# Altium PCB 24DC-8MWPCB.PcbDoc (part 2 of 2)
Units mm, origin at the board's own origin, x right, y up, seen from the top; angles counter-clockwise.
Board outline 24.64 x 72.65 mm, 2 copper layers (Bottom Layer, Top Layer); 12 components, 34 nets, 50 pads, 4349 vias.
Unrouted connection lines stored in the file: 12.
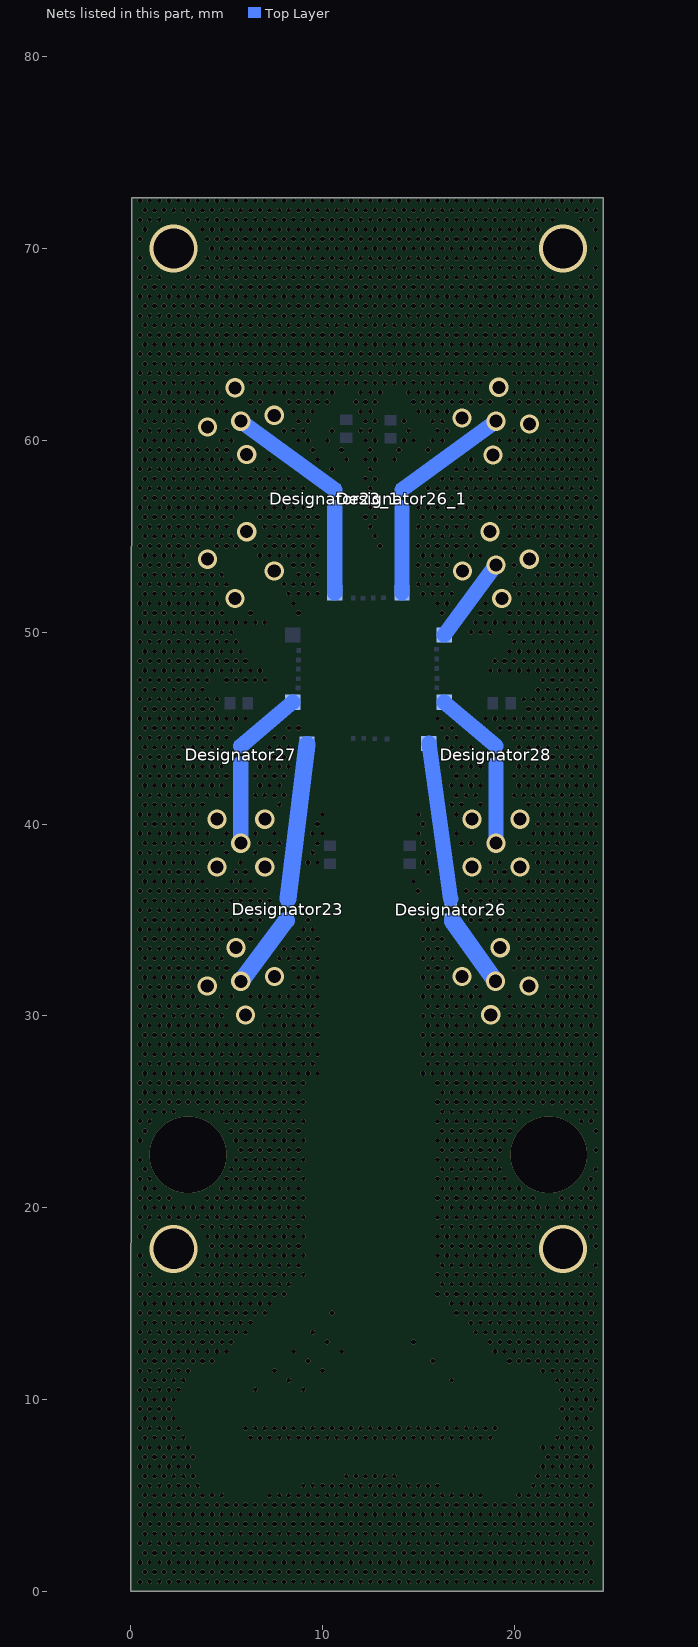
[diagram p2: the nets of this part, all layers, seen from the top]

## Via types
v1: diameter 0.25, hole 0.25, Bottom Layer to Top Layer, 4242 vias
v2: diameter 1, hole 0.68, Bottom Layer to Top Layer, 40 vias
v3: diameter 0.2, hole 0.2, Bottom Layer to Top Layer, 36 vias
v4: diameter 1, hole 0.7, Bottom Layer to Top Layer, 25 vias
v5: diameter 2.5, hole 2.1, Bottom Layer to Top Layer, 3 vias
v6: diameter 4, hole 4, Bottom Layer to Top Layer, 2 vias
v7: diameter 2.5/2.5 (per signal layer), hole 2.1, Bottom Layer to Top Layer, 1 vias

## Nets (pads, with @x,y where several pads share a name; then routed paths per layer and width w, separated by ;. In a path a pad name is that pad's centre, name@x,y a point inside that pad or via, vN(x,y) a via of type N, cw(c..) or ccw(c..) an arc to the next point about the centre after c; other vN are vias at no path point) (continued)
GND: 
  other v1: 0.5,0.5 1,0.5 1.5,0.5 2,0.5 2.5,0.5 3,0.5 3.5,0.5 4,0.5 4.5,0.5 5,0.5 5.5,0.5 6,0.5 6.5,0.5 7,0.5 7.5,0.5 8,0.5 8.5,0.5 9,0.5 9.5,0.5 10,0.5 10.5,0.5 11,0.5 11.5,0.5 12,0.5 12.5,0.5 13,0.5 13.5,0.5 14,0.5 14.5,0.5 15,0.5 15.5,0.5 16,0.5 16.5,0.5 17,0.5 17.5,0.5 18,0.5 18.5,0.5 19,0.5 19.5,0.5 20,0.5 20.5,0.5 21,0.5 21.5,0.5 22,0.5 22.5,0.5 23,0.5 23.5,0.5 24,0.5 0.75,1 1.25,1 1.75,1 2.25,1 2.75,1 3.25,1 3.75,1 4.25,1 4.75,1 5.25,1 5.75,1 6.25,1 6.75,1 7.25,1 7.75,1 8.25,1 8.75,1 9.25,1 9.75,1 10.25,1 10.75,1 11.25,1 11.75,1 12.25,1 12.75,1 13.25,1 13.75,1 14.25,1 14.75,1 15.25,1 15.75,1 16.25,1 16.75,1 17.25,1 17.75,1 18.25,1 18.75,1 19.25,1 19.75,1 20.25,1 20.75,1 21.25,1 21.75,1 22.25,1 22.75,1 23.25,1 23.75,1 0.5,1.5 1,1.5 1.5,1.5 2,1.5 2.5,1.5 3,1.5 3.5,1.5 4,1.5 4.5,1.5 5,1.5 5.5,1.5 6,1.5 6.5,1.5 7,1.5 7.5,1.5 8,1.5 8.5,1.5 9,1.5 9.5,1.5 10,1.5 10.5,1.5 11,1.5 11.5,1.5 12,1.5 12.5,1.5 13,1.5 13.5,1.5 14,1.5 14.5,1.5 15,1.5 15.5,1.5 16,1.5 16.5,1.5 17,1.5 17.5,1.5 18,1.5 18.5,1.5 19,1.5 19.5,1.5 20,1.5 20.5,1.5 21,1.5 21.5,1.5 22,1.5 22.5,1.5 23,1.5 23.5,1.5 24,1.5 0.75,2 1.25,2 1.75,2 2.25,2 2.75,2 3.25,2 3.75,2 4.25,2 4.75,2 5.25,2 5.75,2 6.25,2 6.75,2 7.25,2 7.75,2 8.25,2 8.75,2 9.25,2 9.75,2 10.25,2 10.75,2 11.25,2 11.75,2 12.25,2 12.75,2 13.25,2 13.75,2 14.25,2 14.75,2 15.25,2 15.75,2 16.25,2 16.75,2 17.25,2 17.75,2 18.25,2 18.75,2 19.25,2 19.75,2 20.25,2 20.75,2 21.25,2 21.75,2 22.25,2 22.75,2 23.25,2 23.75,2 0.5,2.5 1,2.5 1.5,2.5 2,2.5 2.5,2.5 3,2.5 3.5,2.5 4,2.5 4.5,2.5 5,2.5 5.5,2.5 6,2.5 6.5,2.5 7,2.5 7.5,2.5 8,2.5 8.5,2.5 9,2.5 9.5,2.5 10,2.5 10.5,2.5 11,2.5 11.5,2.5 12,2.5 12.5,2.5 13,2.5 13.5,2.5 14,2.5 14.5,2.5 15,2.5 15.5,2.5 16,2.5 16.5,2.5 17,2.5 17.5,2.5 18,2.5 18.5,2.5 19,2.5 19.5,2.5 20,2.5 20.5,2.5 21,2.5 21.5,2.5 22,2.5 22.5,2.5 23,2.5 23.5,2.5 24,2.5 0.75,3 1.25,3 1.75,3 2.25,3 2.75,3 3.25,3 3.75,3 4.25,3 4.75,3 5.25,3 5.75,3 6.25,3 6.75,3 7.25,3 7.75,3 8.25,3 8.75,3 9.25,3 9.75,3 10.25,3 10.75,3 11.25,3 11.75,3 12.25,3 12.75,3 13.25,3 13.75,3 14.25,3 14.75,3 15.25,3 15.75,3 16.25,3 16.75,3 17.25,3 17.75,3 18.25,3 18.75,3 19.25,3 19.75,3 20.25,3 20.75,3 21.25,3 21.75,3 22.25,3 22.75,3 23.25,3 23.75,3 0.5,3.5 1,3.5 1.5,3.5 2,3.5 2.5,3.5 3,3.5 3.5,3.5 4,3.5 4.5,3.5 5,3.5 5.5,3.5 6,3.5 6.5,3.5 7,3.5 7.5,3.5 8,3.5 8.5,3.5 9,3.5 9.5,3.5 10,3.5 10.5,3.5 11,3.5 11.5,3.5 12,3.5 12.5,3.5 13,3.5 13.5,3.5 14,3.5 14.5,3.5 15,3.5 15.5,3.5 16,3.5 16.5,3.5 17,3.5 17.5,3.5 18,3.5 18.5,3.5 19,3.5 19.5,3.5 20,3.5 20.5,3.5 21,3.5 21.5,3.5 22,3.5 22.5,3.5 23,3.5 23.5,3.5 24,3.5 0.75,4 1.25,4 1.75,4 2.25,4 2.75,4 3.25,4 3.75,4 4.25,4 4.75,4 5.25,4 5.75,4 6.25,4 6.75,4 7.25,4 7.75,4 8.25,4 8.75,4 9.25,4 9.75,4 10.25,4 10.75,4 11.25,4 11.75,4 12.25,4 12.75,4 13.25,4 13.75,4 14.25,4 14.75,4 15.25,4 15.75,4 16.25,4 16.75,4 17.25,4 17.75,4 18.25,4 18.75,4 19.25,4 19.75,4 20.25,4 20.75,4 21.25,4 21.75,4 22.25,4 22.75,4 23.25,4 23.75,4 0.5,4.5 1,4.5 1.5,4.5 2,4.5 2.5,4.5 3,4.5 3.5,4.5 4,4.5 4.5,4.5 5,4.5 5.5,4.5 6,4.5 6.5,4.5 7,4.5 7.5,4.5 8,4.5 8.5,4.5 9,4.5 9.5,4.5 10,4.5 10.5,4.5 11,4.5 11.5,4.5 12,4.5 12.5,4.5 13,4.5 13.5,4.5 14,4.5 14.5,4.5 15,4.5 15.5,4.5 16,4.5 16.5,4.5 17,4.5 17.5,4.5 18,4.5 18.5,4.5 19,4.5 19.5,4.5 20,4.5 20.5,4.5 21,4.5 21.5,4.5 22,4.5 22.5,4.5 23,4.5 23.5,4.5 24,4.5 0.75,5 1.25,5 1.75,5 2.25,5 2.75,5 3.25,5 3.75,5 4.25,5 4.75,5 7.25,5 7.75,5 8.25,5 8.75,5 9.25,5 9.75,5 10.25,5 10.75,5 11.25,5 11.75,5 12.25,5 12.75,5 13.25,5 13.75,5 14.25,5 14.75,5 15.25,5 15.75,5 16.25,5 16.75,5 17.25,5 17.75,5 18.25,5 20.25,5 20.75,5 21.25,5 21.75,5 22.25,5 22.75,5 23.25,5 23.75,5 0.5,5.5 1,5.5 1.5,5.5 2,5.5 2.5,5.5 3,5.5 3.5,5.5 9,5.5 9.5,5.5 10,5.5 10.5,5.5 11,5.5 11.5,5.5 12,5.5 12.5,5.5 13,5.5 13.5,5.5 14,5.5 14.5,5.5 15,5.5 15.5,5.5 16,5.5 21,5.5 21.5,5.5 22,5.5 22.5,5.5 23,5.5 23.5,5.5 24,5.5 0.75,6 1.25,6 1.75,6 2.25,6 2.75,6 3.25,6 11.25,6 11.75,6 12.25,6 12.75,6 13.25,6 13.75,6 21.25,6 21.75,6 22.25,6 22.75,6 23.25,6 23.75,6 0.5,6.5 1,6.5 1.5,6.5 2,6.5 2.5,6.5 3,6.5 21.5,6.5 22,6.5 22.5,6.5 23,6.5 23.5,6.5 24,6.5 0.75,7 1.25,7 1.75,7 2.25,7 2.75,7 3.25,7 21.75,7 22.25,7 22.75,7 23.25,7 23.75,7 0.5,7.5 1,7.5 1.5,7.5 2,7.5 2.5,7.5 3,7.5 21.5,7.5 22,7.5 22.5,7.5 23,7.5 23.5,7.5 24,7.5 0.75,8 1.25,8 1.75,8 2.25,8 2.75,8 6.25,8 6.75,8 7.25,8 7.75,8 8.25,8 8.75,8 9.25,8 9.75,8 10.25,8 10.75,8 11.25,8 11.75,8 12.25,8 12.75,8 13.25,8 13.75,8 14.25,8 14.75,8 15.25,8 15.75,8 16.25,8 16.75,8 17.25,8 17.75,8 18.25,8 18.75,8 22.25,8 22.75,8 23.25,8 23.75,8 0.5,8.5 1,8.5 1.5,8.5 2,8.5 2.5,8.5 6,8.5 6.5,8.5 7,8.5 7.5,8.5 8,8.5 8.5,8.5 9,8.5 9.5,8.5 10,8.5 10.5,8.5 11,8.5 11.5,8.5 12,8.5 12.5,8.5 13,8.5 13.5,8.5 14,8.5 14.5,8.5 15,8.5 15.5,8.5 16,8.5 16.5,8.5 17,8.5 17.5,8.5 18,8.5 18.5,8.5 19,8.5 22.5,8.5 23,8.5 23.5,8.5 24,8.5 0.75,9 1.25,9 1.75,9 2.25,9 22.75,9 23.25,9 23.75,9 0.5,9.5 1,9.5 1.5,9.5 2,9.5 22.5,9.5 23,9.5 23.5,9.5 24,9.5 0.75,10 1.25,10 1.75,10 2.25,10 22.75,10 23.25,10 23.75,10 24.25,10 0.5,10.5 1,10.5 1.5,10.5 2,10.5 2.5,10.5 6.5,10.5 9,10.5 22.5,10.5 23,10.5 23.5,10.5 24,10.5 0.75,11 1.25,11 1.75,11 2.25,11 2.75,11 8.25,11 16.75,11 22.25,11 22.75,11 23.25,11 23.75,11 24.25,11 0.5,11.5 1,11.5 1.5,11.5 2,11.5 2.5,11.5 3,11.5 7.5,11.5 10,11.5 21.5,11.5 22,11.5 22.5,11.5 23,11.5 23.5,11.5 24,11.5 0.75,12 1.25,12 1.75,12 2.25,12 2.75,12 3.25,12 3.75,12 4.25,12 9.25,12 15.75,12 19.75,12 20.25,12 20.75,12 21.25,12 21.75,12 22.25,12 22.75,12 23.25,12 23.75,12 24.25,12 0.5,12.5 1,12.5 1.5,12.5 2,12.5 2.5,12.5 3,12.5 3.5,12.5 4,12.5 4.5,12.5 5,12.5 8.5,12.5 11,12.5 19,12.5 19.5,12.5 20,12.5 20.5,12.5 21,12.5 21.5,12.5 22,12.5 22.5,12.5 23,12.5 23.5,12.5 24,12.5 0.75,13 1.25,13 1.75,13 2.25,13 2.75,13 3.25,13 3.75,13 4.25,13 4.75,13 5.25,13 10.25,13 14.75,13 18.75,13 19.25,13 19.75,13 20.25,13 20.75,13 21.25,13 21.75,13 22.25,13 22.75,13 23.25,13 23.75,13 24.25,13 0.5,13.5 1,13.5 1.5,13.5 2,13.5 2.5,13.5 3,13.5 3.5,13.5 4,13.5 4.5,13.5 5,13.5 5.5,13.5 6,13.5 9.5,13.5 18,13.5 18.5,13.5 19,13.5 19.5,13.5 20,13.5 20.5,13.5 21,13.5 21.5,13.5 22,13.5 22.5,13.5 23,13.5 23.5,13.5 24,13.5 0.75,14 1.25,14 1.75,14 2.25,14 2.75,14 3.25,14 3.75,14 4.25,14 4.75,14 5.25,14 5.75,14 6.25,14 17.75,14 18.25,14 18.75,14 19.25,14 19.75,14 20.25,14 20.75,14 21.25,14 21.75,14 22.25,14 22.75,14 23.25,14 23.75,14 24.25,14 0.5,14.5 1,14.5 1.5,14.5 2,14.5 2.5,14.5 3,14.5 3.5,14.5 4,14.5 4.5,14.5 5,14.5 5.5,14.5 6,14.5 6.5,14.5 7,14.5 10.5,14.5 17,14.5 17.5,14.5 18,14.5 18.5,14.5 19,14.5 19.5,14.5 20,14.5 20.5,14.5 21,14.5 21.5,14.5 22,14.5 22.5,14.5 23,14.5 23.5,14.5 24,14.5 0.75,15 1.25,15 1.75,15 2.25,15 2.75,15 3.25,15 3.75,15 4.25,15 4.75,15 5.25,15 5.75,15 6.25,15 6.75,15 7.25,15 16.75,15 17.25,15 17.75,15 18.25,15 18.75,15 19.25,15 19.75,15 20.25,15 20.75,15 21.25,15 21.75,15 22.25,15 22.75,15 23.25,15 23.75,15 24.25,15 0.5,15.5 1,15.5 1.5,15.5 2,15.5 2.5,15.5 3,15.5 3.5,15.5 4,15.5 4.5,15.5 5,15.5 5.5,15.5 6,15.5 6.5,15.5 7,15.5 7.5,15.5 8,15.5 16,15.5 16.5,15.5 17,15.5 17.5,15.5 18,15.5 18.5,15.5 19,15.5 19.5,15.5 20,15.5 20.5,15.5 21,15.5 21.5,15.5 22,15.5 22.5,15.5 23,15.5 23.5,15.5 24,15.5 0.75,16 1.25,16 1.75,16 2.25,16 2.75,16 3.25,16 3.75,16 4.25,16 4.75,16 5.25,16 5.75,16 6.25,16 6.75,16 7.25,16 7.75,16 8.25,16 16.25,16 16.75,16 17.25,16 17.75,16 18.25,16 18.75,16 19.25,16 19.75,16 20.25,16 20.75,16 21.25,16 21.75,16 22.25,16 22.75,16 23.25,16 23.75,16 24.25,16 0.5,16.5 1,16.5 3.5,16.5 4,16.5 4.5,16.5 5,16.5 5.5,16.5 6,16.5 6.5,16.5 7,16.5 7.5,16.5 8,16.5 8.5,16.5 9,16.5 16,16.5 16.5,16.5 17,16.5 17.5,16.5 18,16.5 18.5,16.5 19,16.5 19.5,16.5 20,16.5 20.5,16.5 21,16.5 21.5,16.5 23.5,16.5 24,16.5 0.75,17 3.75,17 4.25,17 4.75,17 5.25,17 5.75,17 6.25,17 6.75,17 7.25,17 7.75,17 8.25,17 8.75,17 16.25,17 16.75,17 17.25,17 17.75,17 18.25,17 18.75,17 19.25,17 19.75,17 20.25,17 20.75,17 24.25,17 0.5,17.5 4,17.5 4.5,17.5 5,17.5 5.5,17.5 6,17.5 6.5,17.5 7,17.5 7.5,17.5 8,17.5 8.5,17.5 9,17.5 16,17.5 16.5,17.5 17,17.5 17.5,17.5 18,17.5 18.5,17.5 19,17.5 19.5,17.5 20,17.5 20.5,17.5 21,17.5 4.25,18 4.75,18 5.25,18 5.75,18 6.25,18 6.75,18 7.25,18 7.75,18 8.25,18 8.75,18 16.25,18 16.75,18 17.25,18 17.75,18 18.25,18 18.75,18 19.25,18 19.75,18 20.25,18 20.75,18 24.25,18 0.5,18.5 4,18.5 4.5,18.5 5,18.5 5.5,18.5 6,18.5 6.5,18.5 7,18.5 7.5,18.5 8,18.5 8.5,18.5 9,18.5 16,18.5 16.5,18.5 17,18.5 17.5,18.5 18,18.5 18.5,18.5 19,18.5 19.5,18.5 20,18.5 20.5,18.5 21,18.5 24,18.5 0.75,19 3.75,19 4.25,19 4.75,19 5.25,19 5.75,19 6.25,19 6.75,19 7.25,19 7.75,19 8.25,19 8.75,19 16.25,19 16.75,19 17.25,19 17.75,19 18.25,19 18.75,19 19.25,19 19.75,19 20.25,19 20.75,19 21.25,19 23.75,19 24.25,19 0.5,19.5 1,19.5 1.5,19.5 2,19.5 2.5,19.5 3,19.5 3.5,19.5 4,19.5 4.5,19.5 5,19.5 5.5,19.5 6,19.5 6.5,19.5 7,19.5 7.5,19.5 8,19.5 8.5,19.5 9,19.5 16,19.5 16.5,19.5 17,19.5 17.5,19.5 18,19.5 18.5,19.5 19,19.5 19.5,19.5 20,19.5 20.5,19.5 21,19.5 21.5,19.5 22,19.5 22.5,19.5 23,19.5 23.5,19.5 24,19.5 0.75,20 1.25,20 1.75,20 2.25,20 2.75,20 3.25,20 3.75,20 4.25,20 4.75,20 5.25,20 5.75,20 6.25,20 6.75,20 7.25,20 7.75,20 8.25,20 8.75,20 16.25,20 16.75,20 17.25,20 17.75,20 18.25,20 18.75,20 19.25,20 19.75,20 20.25,20 20.75,20 21.25,20 21.75,20 22.25,20 22.75,20 23.25,20 23.75,20 24.25,20 0.5,20.5 1,20.5 1.5,20.5 2,20.5 4,20.5 4.5,20.5 5,20.5 5.5,20.5 6,20.5 6.5,20.5 7,20.5 7.5,20.5 8,20.5 8.5,20.5 9,20.5 16,20.5 16.5,20.5 17,20.5 17.5,20.5 18,20.5 18.5,20.5 19,20.5 19.5,20.5 20,20.5 20.5,20.5 21,20.5 22.5,20.5 23,20.5 23.5,20.5 24,20.5 0.75,21 1.25,21 4.75,21 5.25,21 5.75,21 6.25,21 6.75,21 7.25,21 7.75,21 8.25,21 8.75,21 16.25,21 16.75,21 17.25,21 17.75,21 18.25,21 18.75,21 19.25,21 19.75,21 20.25,21 23.75,21 24.25,21 0.5,21.5 1,21.5 5,21.5 5.5,21.5 6,21.5 6.5,21.5 7,21.5 7.5,21.5 8,21.5 8.5,21.5 9,21.5 16,21.5 16.5,21.5 17,21.5 17.5,21.5 18,21.5 18.5,21.5 19,21.5 19.5,21.5 24,21.5 0.75,22 5.25,22 5.75,22 6.25,22 6.75,22 7.25,22 7.75,22 8.25,22 8.75,22 16.25,22 16.75,22 17.25,22 17.75,22 18.25,22 18.75,22 19.25,22 24.25,22 0.5,22.5 5.5,22.5 6,22.5 6.5,22.5 7,22.5 7.5,22.5 8,22.5 8.5,22.5 9,22.5 16,22.5 16.5,22.5 17,22.5 17.5,22.5 18,22.5 18.5,22.5 19,22.5 5.75,23 6.25,23 6.75,23 7.25,23 7.75,23 8.25,23 8.75,23 16.25,23 16.75,23 17.25,23 17.75,23 18.25,23 18.75,23 19.25,23 24.25,23 0.5,23.5 5.5,23.5 6,23.5 6.5,23.5 7,23.5 7.5,23.5 8,23.5 8.5,23.5 9,23.5 16,23.5 16.5,23.5 17,23.5 17.5,23.5 18,23.5 18.5,23.5 19,23.5 19.5,23.5 0.75,24 5.25,24 5.75,24 6.25,24 6.75,24 7.25,24 7.75,24 8.25,24 8.75,24 16.25,24 16.75,24 17.25,24 17.75,24 18.25,24 18.75,24 19.25,24 19.75,24 24.25,24 0.5,24.5 1,24.5 5,24.5 5.5,24.5 6,24.5 6.5,24.5 7,24.5 7.5,24.5 8,24.5 8.5,24.5 9,24.5 16,24.5 16.5,24.5 17,24.5 17.5,24.5 18,24.5 18.5,24.5 19,24.5 19.5,24.5 20,24.5 23.5,24.5 24,24.5 0.75,25 1.25,25 1.75,25 2.25,25 3.75,25 4.25,25 4.75,25 5.25,25 5.75,25 6.25,25 6.75,25 7.25,25 7.75,25 8.25,25 8.75,25 16.25,25 16.75,25 17.25,25 17.75,25 18.25,25 18.75,25 19.25,25 19.75,25 20.25,25 20.75,25 22.75,25 23.25,25 23.75,25 24.25,25 0.5,25.5 1,25.5 1.5,25.5 2,25.5 2.5,25.5 3,25.5 3.5,25.5 4,25.5 4.5,25.5 5,25.5 5.5,25.5 6,25.5 6.5,25.5 7,25.5 7.5,25.5 8,25.5 8.5,25.5 9,25.5 16,25.5 16.5,25.5 17,25.5 17.5,25.5 18,25.5 18.5,25.5 19,25.5 19.5,25.5 20,25.5 20.5,25.5 21,25.5 21.5,25.5 22,25.5 22.5,25.5 23,25.5 23.5,25.5 24,25.5 0.75,26 1.25,26 1.75,26 2.25,26 2.75,26 3.25,26 3.75,26 4.25,26 4.75,26 5.25,26 5.75,26 6.25,26 6.75,26 7.25,26 7.75,26 8.25,26 8.75,26 16.25,26 16.75,26 17.25,26 17.75,26 18.25,26 18.75,26 19.25,26 19.75,26 20.25,26 20.75,26 21.25,26 21.75,26 22.25,26 22.75,26 23.25,26 23.75,26 24.25,26 0.5,26.5 1,26.5 1.5,26.5 2,26.5 2.5,26.5 3,26.5 3.5,26.5 4,26.5 4.5,26.5 5,26.5 5.5,26.5 6,26.5 6.5,26.5 7,26.5 7.5,26.5 8,26.5 8.5,26.5 9,26.5 16,26.5 16.5,26.5 17,26.5 17.5,26.5 18,26.5 18.5,26.5 19,26.5 19.5,26.5 20,26.5 20.5,26.5 21,26.5 21.5,26.5 22,26.5 22.5,26.5 23,26.5 23.5,26.5 24,26.5 0.75,27 1.25,27 1.75,27 2.25,27 2.75,27 3.25,27 3.75,27 4.25,27 4.75,27 5.25,27 5.75,27 6.25,27 6.75,27 7.25,27 7.75,27 8.25,27 8.75,27 9.25,27 9.75,27 15.25,27 15.75,27 16.25,27 16.75,27 17.25,27 17.75,27 18.25,27 18.75,27 19.25,27 19.75,27 20.25,27 20.75,27 21.25,27 21.75,27 22.25,27 22.75,27 23.25,27 23.75,27 24.25,27 0.5,27.5 1,27.5 1.5,27.5 2,27.5 2.5,27.5 3,27.5 3.5,27.5 4,27.5 4.5,27.5 5,27.5 5.5,27.5 6,27.5 6.5,27.5 7,27.5 7.5,27.5 8,27.5 8.5,27.5 9,27.5 9.5,27.5 15.5,27.5 16,27.5 16.5,27.5 17,27.5 17.5,27.5 18,27.5 18.5,27.5 19,27.5 19.5,27.5 20,27.5 20.5,27.5 21,27.5 21.5,27.5 22,27.5 22.5,27.5 23,27.5 23.5,27.5 24,27.5 0.75,28 1.25,28 1.75,28 2.25,28 2.75,28 3.25,28 3.75,28 4.25,28 4.75,28 5.25,28 5.75,28 6.25,28 6.75,28 7.25,28 7.75,28 8.25,28 8.75,28 9.25,28 9.75,28 15.25,28 15.75,28 16.25,28 16.75,28 17.25,28 17.75,28 18.25,28 18.75,28 19.25,28 19.75,28 20.25,28 20.75,28 21.25,28 21.75,28 22.25,28 22.75,28 23.25,28 23.75,28 24.25,28 0.5,28.5 1,28.5 1.5,28.5 2,28.5 2.5,28.5 3,28.5 3.5,28.5 4,28.5 4.5,28.5 5,28.5 5.5,28.5 6,28.5 6.5,28.5 7,28.5 7.5,28.5 8,28.5 8.5,28.5 9,28.5 9.5,28.5 15.5,28.5 16,28.5 16.5,28.5 17,28.5 17.5,28.5 18,28.5 18.5,28.5 19,28.5 19.5,28.5 20,28.5 20.5,28.5 21,28.5 21.5,28.5 22,28.5 22.5,28.5 23,28.5 23.5,28.5 24,28.5 0.75,29 1.25,29 1.75,29 2.25,29 2.75,29 3.25,29 3.75,29 4.25,29 4.75,29 5.25,29 5.75,29 6.25,29 6.75,29 7.25,29 7.75,29 8.25,29 8.75,29 9.25,29 9.75,29 15.25,29 15.75,29 16.25,29 16.75,29 17.25,29 17.75,29 18.25,29 18.75,29 19.25,29 19.75,29 20.25,29 20.75,29 21.25,29 21.75,29 22.25,29 22.75,29 23.25,29 23.75,29 24.25,29 0.5,29.5 1,29.5 1.5,29.5 2,29.5 2.5,29.5 3,29.5 3.5,29.5 4,29.5 4.5,29.5 5,29.5 7,29.5 7.5,29.5 8,29.5 8.5,29.5 9,29.5 9.5,29.5 15.5,29.5 16,29.5 16.5,29.5 17,29.5 17.5,29.5 18,29.5 19.5,29.5 20,29.5 20.5,29.5 21,29.5 21.5,29.5 22,29.5 22.5,29.5 23,29.5 23.5,29.5 24,29.5 0.75,30 1.25,30 1.75,30 2.25,30 2.75,30 3.25,30 3.75,30 4.25,30 4.75,30 7.25,30 7.75,30 8.25,30 8.75,30 9.25,30 9.75,30 15.25,30 15.75,30 16.25,30 16.75,30 17.25,30 17.75,30 19.75,30 20.25,30 20.75,30 21.25,30 21.75,30 22.25,30 22.75,30 23.25,30 23.75,30 24.25,30 0.5,30.5 1,30.5 1.5,30.5 2,30.5 2.5,30.5 3,30.5 3.5,30.5 4,30.5 4.5,30.5 5,30.5 7,30.5 7.5,30.5 8,30.5 8.5,30.5 9,30.5 9.5,30.5 15.5,30.5 16,30.5 16.5,30.5 17,30.5 17.5,30.5 18,30.5 19.5,30.5 20,30.5 20.5,30.5 21,30.5 21.5,30.5 22,30.5 22.5,30.5 23,30.5 23.5,30.5 24,30.5 0.75,31 1.25,31 1.75,31 2.25,31 2.75,31 3.25,31 4.75,31 5.25,31 6.25,31 6.75,31 7.25,31 7.75,31 8.25,31 8.75,31 9.25,31 9.75,31 15.25,31 15.75,31 16.25,31 16.75,31 17.25,31 17.75,31 18.25,31 19.75,31 21.75,31 22.25,31 22.75,31 23.25,31 23.75,31 24.25,31 0.5,31.5 1,31.5 1.5,31.5 2,31.5 2.5,31.5 3,31.5 8.5,31.5 9,31.5 9.5,31.5 15.5,31.5 16,31.5 16.5,31.5 18,31.5 22,31.5 22.5,31.5 23,31.5 23.5,31.5 24,31.5 0.75,32 1.25,32 1.75,32 2.25,32 2.75,32 3.25,32 4.75,32 8.75,32 9.25,32 9.75,32 15.25,32 15.75,32 16.25,32 21.75,32 22.25,32 22.75,32 23.25,32 23.75,32 24.25,32 0.5,32.5 1,32.5 1.5,32.5 2,32.5 2.5,32.5 3,32.5 3.5,32.5 4,32.5 4.5,32.5 5,32.5 8.5,32.5 9,32.5 9.5,32.5 15.5,32.5 16,32.5 16.5,32.5 20,32.5 20.5,32.5 21,32.5 21.5,32.5 22,32.5 22.5,32.5 23,32.5 23.5,32.5 24,32.5 0.75,33 1.25,33 1.75,33 2.25,33 2.75,33 3.25,33 3.75,33 4.25,33 4.75,33 7.75,33 8.25,33 8.75,33 9.25,33 9.75,33 15.25,33 15.75,33 16.25,33 16.75,33 20.25,33 20.75,33 21.25,33 21.75,33 22.25,33 22.75,33 23.25,33 23.75,33 24.25,33 0.5,33.5 1,33.5 1.5,33.5 2,33.5 2.5,33.5 3,33.5 3.5,33.5 4,33.5 4.5,33.5 8,33.5 8.5,33.5 9,33.5 9.5,33.5 15.5,33.5 16,33.5 16.5,33.5 20.5,33.5 21,33.5 21.5,33.5 22,33.5 22.5,33.5 23,33.5 23.5,33.5 24,33.5 0.75,34 1.25,34 1.75,34 2.25,34 2.75,34 3.25,34 3.75,34 4.25,34 4.75,34 6.25,34 8.75,34 9.25,34 9.75,34 15.25,34 15.75,34 16.25,34 20.25,34 20.75,34 21.25,34 21.75,34 22.25,34 22.75,34 23.25,34 23.75,34 24.25,34 0.5,34.5 1,34.5 1.5,34.5 2,34.5 2.5,34.5 3,34.5 3.5,34.5 4,34.5 4.5,34.5 5,34.5 5.5,34.5 6,34.5 6.5,34.5 9,34.5 9.5,34.5 15.5,34.5 16,34.5 18.5,34.5 19,34.5 19.5,34.5 20,34.5 20.5,34.5 21,34.5 21.5,34.5 22,34.5 22.5,34.5 23,34.5 23.5,34.5 24,34.5 0.75,35 1.25,35 1.75,35 2.25,35 2.75,35 3.25,35 3.75,35 4.25,35 4.75,35 5.25,35 5.75,35 6.25,35 6.75,35 9.25,35 15.25,35 15.75,35 17.75,35 18.25,35 18.75,35 19.25,35 19.75,35 20.25,35 20.75,35 21.25,35 21.75,35 22.25,35 22.75,35 23.25,35 23.75,35 24.25,35 0.5,35.5 1,35.5 1.5,35.5 2,35.5 2.5,35.5 3,35.5 3.5,35.5 4,35.5 4.5,35.5 5,35.5 5.5,35.5 6,35.5 6.5,35.5 7,35.5 7.5,35.5 9,35.5 16,35.5 17.5,35.5 18,35.5 18.5,35.5 19,35.5 19.5,35.5 20,35.5 20.5,35.5 21,35.5 21.5,35.5 22,35.5 22.5,35.5 23,35.5 23.5,35.5 24,35.5 0.75,36 1.25,36 1.75,36 2.25,36 2.75,36 3.25,36 3.75,36 4.25,36 4.75,36 5.25,36 5.75,36 6.25,36 6.75,36 7.25,36 17.75,36 18.25,36 18.75,36 19.25,36 19.75,36 20.25,36 20.75,36 21.25,36 21.75,36 22.25,36 22.75,36 23.25,36 23.75,36 24.25,36 0.5,36.5 1,36.5 1.5,36.5 2,36.5 2.5,36.5 3,36.5 3.5,36.5 4,36.5 4.5,36.5 5,36.5 5.5,36.5 6,36.5 6.5,36.5 7,36.5 15,36.5 17.5,36.5 18,36.5 18.5,36.5 19,36.5 19.5,36.5 20,36.5 20.5,36.5 21,36.5 21.5,36.5 22,36.5 22.5,36.5 23,36.5 23.5,36.5 24,36.5 0.75,37 1.25,37 1.75,37 2.25,37 2.75,37 3.25,37 3.75,37 5.25,37 5.75,37 6.25,37 14.75,37 18.25,37 18.75,37 19.25,37 19.75,37 20.75,37 21.25,37 21.75,37 22.25,37 22.75,37 23.25,37 23.75,37 24.25,37 0.5,37.5 1,37.5 1.5,37.5 2,37.5 2.5,37.5 3,37.5 3.5,37.5 5.5,37.5 6,37.5 15.5,37.5 19,37.5 19.5,37.5 21.5,37.5 22,37.5 22.5,37.5 23,37.5 23.5,37.5 24,37.5 0.75,38 1.25,38 1.75,38 2.25,38 2.75,38 3.25,38 5.75,38 9.25,38 9.75,38 15.25,38 18.75,38 19.25,38 21.25,38 21.75,38 22.25,38 22.75,38 23.25,38 23.75,38 24.25,38 0.5,38.5 1,38.5 1.5,38.5 2,38.5 2.5,38.5 3,38.5 3.5,38.5 4,38.5 5,38.5 6.5,38.5 7.5,38.5 9.5,38.5 15.5,38.5 21,38.5 21.5,38.5 22,38.5 22.5,38.5 23,38.5 23.5,38.5 24,38.5 0.75,39 1.25,39 1.75,39 2.25,39 2.75,39 3.25,39 3.75,39 4.25,39 4.75,39 6.75,39 7.25,39 7.75,39 9.75,39 15.25,39 17.25,39 17.75,39 20.25,39 20.75,39 21.25,39 21.75,39 22.25,39 22.75,39 23.25,39 23.75,39 24.25,39 0.5,39.5 1,39.5 1.5,39.5 2,39.5 2.5,39.5 3,39.5 3.5,39.5 4,39.5 5,39.5 6.5,39.5 7.5,39.5 9.5,39.5 10,39.5 15,39.5 17,39.5 21,39.5 21.5,39.5 22,39.5 22.5,39.5 23,39.5 23.5,39.5 24,39.5 0.75,40 1.25,40 1.75,40 2.25,40 2.75,40 3.25,40 9.75,40 15.25,40 21.25,40 21.75,40 22.25,40 22.75,40 23.25,40 23.75,40 24.25,40 0.5,40.5 1,40.5 1.5,40.5 2,40.5 2.5,40.5 3,40.5 3.5,40.5 10,40.5 15,40.5 17,40.5 21.5,40.5 22,40.5 22.5,40.5 23,40.5 23.5,40.5 24,40.5 0.75,41 1.25,41 1.75,41 2.25,41 2.75,41 3.25,41 3.75,41 7.75,41 16.75,41 17.25,41 18.25,41 20.75,41 21.25,41 21.75,41 22.25,41 22.75,41 23.25,41 23.75,41 24.25,41 0.5,41.5 1,41.5 1.5,41.5 2,41.5 2.5,41.5 3,41.5 3.5,41.5 4,41.5 4.5,41.5 5,41.5 6.5,41.5 7,41.5 7.5,41.5 8,41.5 17,41.5 17.5,41.5 18,41.5 20,41.5 20.5,41.5 21,41.5 21.5,41.5 22,41.5 22.5,41.5 23,41.5 23.5,41.5 24,41.5 0.75,42 1.25,42 1.75,42 2.25,42 2.75,42 3.25,42 3.75,42 4.25,42 4.75,42 6.75,42 7.25,42 7.75,42 16.75,42 17.25,42 17.75,42 18.25,42 20.25,42 20.75,42 21.25,42 21.75,42 22.25,42 22.75,42 23.25,42 23.75,42 24.25,42 0.5,42.5 1,42.5 1.5,42.5 2,42.5 2.5,42.5 3,42.5 3.5,42.5 4,42.5 4.5,42.5 5,42.5 6.5,42.5 7,42.5 7.5,42.5 8,42.5 17,42.5 17.5,42.5 18,42.5 20,42.5 20.5,42.5 21,42.5 21.5,42.5 22,42.5 22.5,42.5 23,42.5 23.5,42.5 24,42.5 0.75,43 1.25,43 1.75,43 2.25,43 2.75,43 3.25,43 3.75,43 4.25,43 4.75,43 6.75,43 7.25,43 7.75,43 8.25,43 16.75,43 17.25,43 17.75,43 18.25,43 20.25,43 20.75,43 21.25,43 21.75,43 22.25,43 22.75,43 23.25,43 23.75,43 24.25,43 0.5,43.5 1,43.5 1.5,43.5 2,43.5 2.5,43.5 3,43.5 3.5,43.5 4,43.5 4.5,43.5 5,43.5 6.5,43.5 7,43.5 7.5,43.5 8,43.5 16.5,43.5 17,43.5 17.5,43.5 18,43.5 20,43.5 20.5,43.5 21,43.5 21.5,43.5 22,43.5 22.5,43.5 23,43.5 23.5,43.5 24,43.5 0.75,44 1.25,44 1.75,44 2.25,44 2.75,44 3.25,44 3.75,44 4.25,44 4.75,44 7.25,44 7.75,44 8.25,44 16.75,44 17.25,44 17.75,44 20.25,44 20.75,44 21.25,44 21.75,44 22.25,44 22.75,44 23.25,44 23.75,44 24.25,44 0.5,44.5 1,44.5 1.5,44.5 2,44.5 2.5,44.5 3,44.5 3.5,44.5 4,44.5 4.5,44.5 5,44.5 7.5,44.5 8,44.5 16.5,44.5 17,44.5 20,44.5 20.5,44.5 21,44.5 21.5,44.5 22,44.5 22.5,44.5 23,44.5 23.5,44.5 24,44.5 0.75,45 1.25,45 1.75,45 2.25,45 2.75,45 3.25,45 3.75,45 4.25,45 4.75,45 5.25,45 8.25,45 8.75,45 16.25,45 16.75,45 19.25,45 19.75,45 20.25,45 20.75,45 21.25,45 21.75,45 22.25,45 22.75,45 23.25,45 23.75,45 24.25,45 0.5,45.5 1,45.5 1.5,45.5 2,45.5 2.5,45.5 3,45.5 3.5,45.5 4,45.5 4.5,45.5 5,45.5 5.5,45.5 6,45.5 16,45.5 18.5,45.5 19,45.5 19.5,45.5 20,45.5 20.5,45.5 21,45.5 21.5,45.5 22,45.5 22.5,45.5 23,45.5 23.5,45.5 24,45.5 0.75,46 1.25,46 1.75,46 2.25,46 2.75,46 3.25,46 3.75,46 4.25,46 20.75,46 21.25,46 21.75,46 22.25,46 22.75,46 23.25,46 23.75,46 24.25,46 0.5,46.5 1,46.5 1.5,46.5 2,46.5 2.5,46.5 3,46.5 3.5,46.5 4,46.5 4.5,46.5 20.5,46.5 21,46.5 21.5,46.5 22,46.5 22.5,46.5 23,46.5 23.5,46.5 24,46.5 0.75,47 1.25,47 1.75,47 2.25,47 2.75,47 3.25,47 3.75,47 21.25,47 21.75,47 22.25,47 22.75,47 23.25,47 23.75,47 24.25,47 0.5,47.5 1,47.5 1.5,47.5 2,47.5 2.5,47.5 3,47.5 3.5,47.5 4,47.5 5,47.5 5.5,47.5 6,47.5 6.5,47.5 7,47.5 21.5,47.5 22,47.5 22.5,47.5 23,47.5 23.5,47.5 24,47.5 0.75,48 1.25,48 1.75,48 2.25,48 2.75,48 3.25,48 3.75,48 4.25,48 4.75,48 5.25,48 5.75,48 6.25,48 6.75,48 18.75,48 19.25,48 19.75,48 20.25,48 20.75,48 21.25,48 21.75,48 22.25,48 22.75,48 23.25,48 23.75,48 24.25,48 0.5,48.5 1,48.5 1.5,48.5 2,48.5 2.5,48.5 3,48.5 3.5,48.5 4,48.5 4.5,48.5 5,48.5 5.5,48.5 6,48.5 19,48.5 19.5,48.5 20,48.5 20.5,48.5 21,48.5 21.5,48.5 22,48.5 22.5,48.5 23,48.5 23.5,48.5 24,48.5 0.75,49 1.25,49 1.75,49 2.25,49 2.75,49 3.25,49 3.75,49 4.25,49 4.75,49 5.25,49 5.75,49 19.75,49 20.25,49 20.75,49 21.25,49 21.75,49 22.25,49 22.75,49 23.25,49 23.75,49 24.25,49 0.5,49.5 1,49.5 1.5,49.5 2,49.5 2.5,49.5 3,49.5 3.5,49.5 4,49.5 4.5,49.5 5,49.5 5.5,49.5 20,49.5 20.5,49.5 21,49.5 21.5,49.5 22,49.5 22.5,49.5 23,49.5 23.5,49.5 24,49.5 0.75,50 1.25,50 1.75,50 2.25,50 2.75,50 3.25,50 3.75,50 4.25,50 4.75,50 5.25,50 17.75,50 18.25,50 18.75,50 19.75,50 20.25,50 20.75,50 21.25,50 21.75,50 22.25,50 22.75,50 23.25,50 23.75,50 24.25,50 0.5,50.5 1,50.5 1.5,50.5 2,50.5 2.5,50.5 3,50.5 3.5,50.5 4,50.5 4.5,50.5 5,50.5 5.5,50.5 6,50.5 6.5,50.5 7,50.5 18,50.5 18.5,50.5 19,50.5 19.5,50.5 20,50.5 20.5,50.5 21,50.5 21.5,50.5 22,50.5 22.5,50.5 23,50.5 23.5,50.5 24,50.5 0.75,51 1.25,51 1.75,51 2.25,51 2.75,51 3.25,51 3.75,51 4.25,51 4.75,51 6.25,51 8.75,51 16.25,51 18.25,51 18.75,51 19.75,51 20.25,51 20.75,51 21.25,51 21.75,51 22.25,51 22.75,51 23.25,51 23.75,51 24.25,51 0.5,51.5 1,51.5 1.5,51.5 2,51.5 2.5,51.5 3,51.5 3.5,51.5 4,51.5 4.5,51.5 8.5,51.5 16,51.5 16.5,51.5 18.5,51.5 20.5,51.5 21,51.5 21.5,51.5 22,51.5 22.5,51.5 23,51.5 23.5,51.5 24,51.5 0.75,52 1.25,52 1.75,52 2.25,52 2.75,52 3.25,52 3.75,52 4.25,52 8.25,52 8.75,52 9.25,52 9.75,52 15.25,52 15.75,52 16.25,52 16.75,52 20.25,52 20.75,52 21.25,52 21.75,52 22.25,52 22.75,52 23.25,52 23.75,52 24.25,52 0.5,52.5 1,52.5 1.5,52.5 2,52.5 2.5,52.5 3,52.5 3.5,52.5 4,52.5 4.5,52.5 5,52.5 8,52.5 8.5,52.5 9,52.5 9.5,52.5 15,52.5 15.5,52.5 16,52.5 16.5,52.5 20,52.5 20.5,52.5 21,52.5 21.5,52.5 22,52.5 22.5,52.5 23,52.5 23.5,52.5 24,52.5 0.75,53 1.25,53 1.75,53 2.25,53 2.75,53 3.25,53 3.75,53 4.25,53 4.75,53 8.75,53 9.25,53 9.75,53 15.25,53 15.75,53 16.25,53 20.25,53 21.25,53 21.75,53 22.25,53 22.75,53 23.25,53 23.75,53 24.25,53 0.5,53.5 1,53.5 1.5,53.5 2,53.5 2.5,53.5 3,53.5 8.5,53.5 9,53.5 9.5,53.5 15,53.5 15.5,53.5 16,53.5 16.5,53.5 20,53.5 22,53.5 22.5,53.5 23,53.5 23.5,53.5 24,53.5 0.75,54 1.25,54 1.75,54 2.25,54 2.75,54 6.75,54 7.25,54 7.75,54 8.25,54 8.75,54 9.25,54 9.75,54 15.25,54 15.75,54 16.25,54 16.75,54 17.75,54 18.25,54 21.75,54 22.25,54 22.75,54 23.25,54 23.75,54 24.25,54 0.5,54.5 1,54.5 1.5,54.5 2,54.5 2.5,54.5 3,54.5 3.5,54.5 4.5,54.5 5,54.5 5.5,54.5 6.5,54.5 7,54.5 7.5,54.5 8,54.5 8.5,54.5 9,54.5 9.5,54.5 13,54.5 15,54.5 15.5,54.5 16,54.5 16.5,54.5 17,54.5 17.5,54.5 18,54.5 19.5,54.5 20,54.5 21.5,54.5 22,54.5 22.5,54.5 23,54.5 23.5,54.5 24,54.5 0.75,55 1.25,55 1.75,55 2.25,55 2.75,55 3.25,55 3.75,55 4.25,55 4.75,55 5.25,55 7.25,55 7.75,55 8.25,55 8.75,55 9.25,55 9.75,55 12.75,55 15.25,55 15.75,55 16.25,55 16.75,55 17.25,55 17.75,55 19.75,55 20.25,55 20.75,55 21.25,55 21.75,55 22.25,55 22.75,55 23.25,55 23.75,55 24.25,55 0.5,55.5 1,55.5 1.5,55.5 2,55.5 2.5,55.5 3,55.5 3.5,55.5 4,55.5 4.5,55.5 5,55.5 7,55.5 7.5,55.5 8,55.5 8.5,55.5 9,55.5 9.5,55.5 12.5,55.5 15,55.5 15.5,55.5 16,55.5 16.5,55.5 17,55.5 17.5,55.5 20,55.5 20.5,55.5 21,55.5 21.5,55.5 22,55.5 22.5,55.5 23,55.5 23.5,55.5 24,55.5 0.75,56 1.25,56 1.75,56 2.25,56 2.75,56 3.25,56 3.75,56 4.25,56 4.75,56 5.25,56 6.75,56 7.25,56 7.75,56 8.25,56 8.75,56 9.25,56 9.75,56 12.25,56 12.75,56 15.25,56 15.75,56 16.25,56 16.75,56 17.25,56 17.75,56 18.25,56 19.25,56 19.75,56 20.25,56 20.75,56 21.25,56 21.75,56 22.25,56 22.75,56 23.25,56 23.75,56 24.25,56 0.5,56.5 1,56.5 1.5,56.5 2,56.5 2.5,56.5 3,56.5 3.5,56.5 4,56.5 4.5,56.5 5,56.5 5.5,56.5 6,56.5 6.5,56.5 7,56.5 7.5,56.5 8,56.5 8.5,56.5 9,56.5 9.5,56.5 12.5,56.5 15,56.5 15.5,56.5 16,56.5 16.5,56.5 17,56.5 17.5,56.5 18,56.5 18.5,56.5 19,56.5 19.5,56.5 20,56.5 20.5,56.5 21,56.5 21.5,56.5 22,56.5 22.5,56.5 23,56.5 23.5,56.5 24,56.5 0.75,57 1.25,57 1.75,57 2.25,57 2.75,57 3.25,57 3.75,57 4.25,57 4.75,57 5.25,57 5.75,57 6.25,57 6.75,57 7.25,57 7.75,57 8.25,57 8.75,57 9.25,57 9.75,57 12.25,57 12.75,57 15.25,57 15.75,57 16.25,57 16.75,57 17.25,57 17.75,57 18.25,57 18.75,57 19.25,57 19.75,57 20.25,57 20.75,57 21.25,57 21.75,57 22.25,57 22.75,57 23.25,57 23.75,57 24.25,57 0.5,57.5 1,57.5 1.5,57.5 2,57.5 2.5,57.5 3,57.5 3.5,57.5 4,57.5 4.5,57.5 5,57.5 5.5,57.5 6,57.5 6.5,57.5 7,57.5 7.5,57.5 8,57.5 8.5,57.5 9,57.5 12.5,57.5 15.5,57.5 16,57.5 16.5,57.5 17,57.5 17.5,57.5 18,57.5 18.5,57.5 19,57.5 19.5,57.5 20,57.5 20.5,57.5 21,57.5 21.5,57.5 22,57.5 22.5,57.5 23,57.5 23.5,57.5 24,57.5 0.75,58 1.25,58 1.75,58 2.25,58 2.75,58 3.25,58 3.75,58 4.25,58 4.75,58 5.25,58 5.75,58 6.25,58 6.75,58 7.25,58 7.75,58 8.25,58 12.25,58 12.75,58 16.25,58 16.75,58 17.25,58 17.75,58 18.25,58 18.75,58 19.25,58 19.75,58 20.25,58 20.75,58 21.25,58 21.75,58 22.25,58 22.75,58 23.25,58 23.75,58 24.25,58 0.5,58.5 1,58.5 1.5,58.5 2,58.5 2.5,58.5 3,58.5 3.5,58.5 4,58.5 4.5,58.5 5,58.5 5.5,58.5 6.5,58.5 7,58.5 7.5,58.5 10.5,58.5 12.5,58.5 17,58.5 17.5,58.5 18,58.5 18.5,58.5 19.5,58.5 20,58.5 20.5,58.5 21,58.5 21.5,58.5 22,58.5 22.5,58.5 23,58.5 23.5,58.5 24,58.5 0.75,59 1.25,59 1.75,59 2.25,59 2.75,59 3.25,59 3.75,59 4.25,59 4.75,59 5.25,59 7.25,59 9.75,59 11.25,59 12.25,59 12.75,59 13.75,59 17.75,59 19.75,59 20.25,59 20.75,59 21.25,59 21.75,59 22.25,59 22.75,59 23.25,59 23.75,59 24.25,59 0.5,59.5 1,59.5 1.5,59.5 2,59.5 2.5,59.5 3,59.5 3.5,59.5 4,59.5 4.5,59.5 5,59.5 9.5,59.5 11,59.5 12.5,59.5 14,59.5 15.5,59.5 20,59.5 20.5,59.5 21,59.5 21.5,59.5 22,59.5 22.5,59.5 23,59.5 23.5,59.5 24,59.5 0.75,60 1.25,60 1.75,60 2.25,60 2.75,60 3.25,60 4.75,60 5.25,60 8.75,60 9.25,60 10.25,60 12.25,60 12.75,60 14.25,60 14.75,60 15.75,60 16.25,60 19.25,60 19.75,60 20.25,60 20.75,60 21.25,60 21.75,60 22.25,60 22.75,60 23.25,60 23.75,60 24.25,60 0.5,60.5 1,60.5 1.5,60.5 2,60.5 2.5,60.5 3,60.5 5,60.5 8,60.5 8.5,60.5 9,60.5 10.5,60.5 12,60.5 12.5,60.5 14.5,60.5 16,60.5 16.5,60.5 20,60.5 22,60.5 22.5,60.5 23,60.5 23.5,60.5 24,60.5 0.75,61 1.25,61 1.75,61 2.25,61 2.75,61 8.75,61 9.25,61 12.25,61 12.75,61 14.25,61 15.75,61 16.25,61 21.75,61 22.25,61 22.75,61 23.25,61 23.75,61 24.25,61 0.5,61.5 1,61.5 1.5,61.5 2,61.5 2.5,61.5 3,61.5 3.5,61.5 4.5,61.5 5,61.5 6.5,61.5 8.5,61.5 9,61.5 9.5,61.5 12,61.5 12.5,61.5 15,61.5 15.5,61.5 16,61.5 16.5,61.5 20,61.5 21.5,61.5 22,61.5 22.5,61.5 23,61.5 23.5,61.5 24,61.5 0.75,62 1.25,62 1.75,62 2.25,62 2.75,62 3.25,62 3.75,62 4.25,62 4.75,62 6.25,62 6.75,62 8.25,62 8.75,62 9.25,62 9.75,62 10.25,62 11.75,62 12.25,62 12.75,62 14.75,62 15.25,62 15.75,62 16.25,62 16.75,62 17.25,62 17.75,62 18.25,62 18.75,62 19.75,62 20.25,62 20.75,62 21.25,62 21.75,62 22.25,62 22.75,62 23.25,62 23.75,62 24.25,62 0.5,62.5 1,62.5 1.5,62.5 2,62.5 2.5,62.5 3,62.5 3.5,62.5 4,62.5 4.5,62.5 6.5,62.5 7,62.5 7.5,62.5 8,62.5 8.5,62.5 9,62.5 9.5,62.5 10,62.5 10.5,62.5 12,62.5 12.5,62.5 13,62.5 14.5,62.5 15,62.5 15.5,62.5 16,62.5 16.5,62.5 17,62.5 17.5,62.5 18,62.5 20,62.5 20.5,62.5 21,62.5 21.5,62.5 22,62.5 22.5,62.5 23,62.5 23.5,62.5 24,62.5 0.75,63 1.25,63 1.75,63 2.25,63 2.75,63 3.25,63 3.75,63 4.25,63 6.25,63 6.75,63 7.25,63 7.75,63 8.25,63 8.75,63 9.25,63 9.75,63 10.25,63 10.75,63 11.25,63 11.75,63 12.25,63 12.75,63 13.25,63 13.75,63 14.25,63 14.75,63 15.25,63 15.75,63 16.25,63 16.75,63 17.25,63 17.75,63 18.25,63 20.25,63 20.75,63 21.25,63 21.75,63 22.25,63 22.75,63 23.25,63 23.75,63 24.25,63 0.5,63.5 1,63.5 1.5,63.5 2,63.5 2.5,63.5 3,63.5 3.5,63.5 4,63.5 4.5,63.5 5,63.5 6,63.5 6.5,63.5 7,63.5 7.5,63.5 8,63.5 8.5,63.5 9,63.5 9.5,63.5 10,63.5 10.5,63.5 11,63.5 11.5,63.5 12,63.5 12.5,63.5 13,63.5 13.5,63.5 14,63.5 14.5,63.5 15,63.5 15.5,63.5 16,63.5 16.5,63.5 17,63.5 17.5,63.5 18,63.5 18.5,63.5 20,63.5 20.5,63.5 21,63.5 21.5,63.5 22,63.5 22.5,63.5 23,63.5 23.5,63.5 24,63.5 0.75,64 1.25,64 1.75,64 2.25,64 2.75,64 3.25,64 3.75,64 4.25,64 4.75,64 5.25,64 5.75,64 6.25,64 6.75,64 7.25,64 7.75,64 8.25,64 8.75,64 9.25,64 9.75,64 10.25,64 10.75,64 11.25,64 11.75,64 12.25,64 12.75,64 13.25,64 13.75,64 14.25,64 14.75,64 15.25,64 15.75,64 16.25,64 16.75,64 17.25,64 17.75,64 18.25,64 18.75,64 19.25,64 19.75,64 20.25,64 20.75,64 21.25,64 21.75,64 22.25,64 22.75,64 23.25,64 23.75,64 24.25,64 0.5,64.5 1,64.5 1.5,64.5 2,64.5 2.5,64.5 3,64.5 3.5,64.5 4,64.5 4.5,64.5 5,64.5 5.5,64.5 6,64.5 6.5,64.5 7,64.5 7.5,64.5 8,64.5 8.5,64.5 9,64.5 9.5,64.5 10,64.5 10.5,64.5 11,64.5 11.5,64.5 12,64.5 12.5,64.5 13,64.5 13.5,64.5 14,64.5 14.5,64.5 15,64.5 15.5,64.5 16,64.5 16.5,64.5 17,64.5 17.5,64.5 18,64.5 18.5,64.5 19,64.5 19.5,64.5 20,64.5 20.5,64.5 21,64.5 21.5,64.5 22,64.5 22.5,64.5 23,64.5 23.5,64.5 24,64.5 0.75,65 1.25,65 1.75,65 2.25,65 2.75,65 3.25,65 3.75,65 4.25,65 4.75,65 5.25,65 5.75,65 6.25,65 6.75,65 7.25,65 7.75,65 8.25,65 8.75,65 9.25,65 9.75,65 10.25,65 10.75,65 11.25,65 11.75,65 12.25,65 12.75,65 13.25,65 13.75,65 14.25,65 14.75,65 15.25,65 15.75,65 16.25,65 16.75,65 17.25,65 17.75,65 18.25,65 18.75,65 19.25,65 19.75,65 20.25,65 20.75,65 21.25,65 21.75,65 22.25,65 22.75,65 23.25,65 23.75,65 24.25,65 0.5,65.5 1,65.5 1.5,65.5 2,65.5 2.5,65.5 3,65.5 3.5,65.5 4,65.5 4.5,65.5 5,65.5 5.5,65.5 6,65.5 6.5,65.5 7,65.5 7.5,65.5 8,65.5 8.5,65.5 9,65.5 9.5,65.5 10,65.5 10.5,65.5 11,65.5 11.5,65.5 12,65.5 12.5,65.5 13,65.5 13.5,65.5 14,65.5 14.5,65.5 15,65.5 15.5,65.5 16,65.5 16.5,65.5 17,65.5 17.5,65.5 18,65.5 18.5,65.5 19,65.5 19.5,65.5 20,65.5 20.5,65.5 21,65.5 21.5,65.5 22,65.5 22.5,65.5 23,65.5 23.5,65.5 24,65.5 0.75,66 1.25,66 1.75,66 2.25,66 2.75,66 3.25,66 3.75,66 4.25,66 4.75,66 5.25,66 5.75,66 6.25,66 6.75,66 7.25,66 7.75,66 8.25,66 8.75,66 9.25,66 9.75,66 10.25,66 10.75,66 11.25,66 11.75,66 12.25,66 12.75,66 13.25,66 13.75,66 14.25,66 14.75,66 15.25,66 15.75,66 16.25,66 16.75,66 17.25,66 17.75,66 18.25,66 18.75,66 19.25,66 19.75,66 20.25,66 20.75,66 21.25,66 21.75,66 22.25,66 22.75,66 23.25,66 23.75,66 24.25,66 0.5,66.5 1,66.5 1.5,66.5 2,66.5 2.5,66.5 3,66.5 3.5,66.5 4,66.5 4.5,66.5 5,66.5 5.5,66.5 6,66.5 6.5,66.5 7,66.5 7.5,66.5 8,66.5 8.5,66.5 9,66.5 9.5,66.5 10,66.5 10.5,66.5 11,66.5 11.5,66.5 12,66.5 12.5,66.5 13,66.5 13.5,66.5 14,66.5 14.5,66.5 15,66.5 15.5,66.5 16,66.5 16.5,66.5 17,66.5 17.5,66.5 18,66.5 18.5,66.5 19,66.5 19.5,66.5 20,66.5 20.5,66.5 21,66.5 21.5,66.5 22,66.5 22.5,66.5 23,66.5 23.5,66.5 24,66.5 0.75,67 1.25,67 1.75,67 2.25,67 2.75,67 3.25,67 3.75,67 4.25,67 4.75,67 5.25,67 5.75,67 6.25,67 6.75,67 7.25,67 7.75,67 8.25,67 8.75,67 9.25,67 9.75,67 10.25,67 10.75,67 11.25,67 11.75,67 12.25,67 12.75,67 13.25,67 13.75,67 14.25,67 14.75,67 15.25,67 15.75,67 16.25,67 16.75,67 17.25,67 17.75,67 18.25,67 18.75,67 19.25,67 19.75,67 20.25,67 20.75,67 21.25,67 21.75,67 22.25,67 22.75,67 23.25,67 23.75,67 24.25,67 0.5,67.5 1,67.5 1.5,67.5 2,67.5 2.5,67.5 3,67.5 3.5,67.5 4,67.5 4.5,67.5 5,67.5 5.5,67.5 6,67.5 6.5,67.5 7,67.5 7.5,67.5 8,67.5 8.5,67.5 9,67.5 9.5,67.5 10,67.5 10.5,67.5 11,67.5 11.5,67.5 12,67.5 12.5,67.5 13,67.5 13.5,67.5 14,67.5 14.5,67.5 15,67.5 15.5,67.5 16,67.5 16.5,67.5 17,67.5 17.5,67.5 18,67.5 18.5,67.5 19,67.5 19.5,67.5 20,67.5 20.5,67.5 21,67.5 21.5,67.5 22,67.5 22.5,67.5 23,67.5 23.5,67.5 24,67.5 0.75,68 1.25,68 1.75,68 2.25,68 2.75,68 3.25,68 3.75,68 4.25,68 4.75,68 5.25,68 5.75,68 6.25,68 6.75,68 7.25,68 7.75,68 8.25,68 8.75,68 9.25,68 9.75,68 10.25,68 10.75,68 11.25,68 11.75,68 12.25,68 12.75,68 13.25,68 13.75,68 14.25,68 14.75,68 15.25,68 15.75,68 16.25,68 16.75,68 17.25,68 17.75,68 18.25,68 18.75,68 19.25,68 19.75,68 20.25,68 20.75,68 21.25,68 21.75,68 22.25,68 22.75,68 23.25,68 23.75,68 24.25,68 0.5,68.5 1,68.5 1.5,68.5 3,68.5 3.5,68.5 4,68.5 4.5,68.5 5,68.5 5.5,68.5 6,68.5 6.5,68.5 7,68.5 7.5,68.5 8,68.5 8.5,68.5 9,68.5 9.5,68.5 10,68.5 10.5,68.5 11,68.5 11.5,68.5 12,68.5 12.5,68.5 13,68.5 13.5,68.5 14,68.5 14.5,68.5 15,68.5 15.5,68.5 16,68.5 16.5,68.5 17,68.5 17.5,68.5 18,68.5 18.5,68.5 19,68.5 19.5,68.5 20,68.5 20.5,68.5 21,68.5 21.5,68.5 22,68.5 23.5,68.5 24,68.5 0.75,69 3.75,69 4.25,69 4.75,69 5.25,69 5.75,69 6.25,69 6.75,69 7.25,69 7.75,69 8.25,69 8.75,69 9.25,69 9.75,69 10.25,69 10.75,69 11.25,69 11.75,69 12.25,69 12.75,69 13.25,69 13.75,69 14.25,69 14.75,69 15.25,69 15.75,69 16.25,69 16.75,69 17.25,69 17.75,69 18.25,69 18.75,69 19.25,69 19.75,69 20.25,69 20.75,69 21.25,69 24.25,69 0.5,69.5 4,69.5 4.5,69.5 5,69.5 5.5,69.5 6,69.5 6.5,69.5 7,69.5 7.5,69.5 8,69.5 8.5,69.5 9,69.5 9.5,69.5 10,69.5 10.5,69.5 11,69.5 11.5,69.5 12,69.5 12.5,69.5 13,69.5 13.5,69.5 14,69.5 14.5,69.5 15,69.5 15.5,69.5 16,69.5 16.5,69.5 17,69.5 17.5,69.5 18,69.5 18.5,69.5 19,69.5 19.5,69.5 20,69.5 20.5,69.5 21,69.5 4.25,70 4.75,70 5.25,70 5.75,70 6.25,70 6.75,70 7.25,70 7.75,70 8.25,70 8.75,70 9.25,70 9.75,70 10.25,70 10.75,70 11.25,70 11.75,70 12.25,70 12.75,70 13.25,70 13.75,70 14.25,70 14.75,70 15.25,70 15.75,70 16.25,70 16.75,70 17.25,70 17.75,70 18.25,70 18.75,70 19.25,70 19.75,70 20.25,70 20.75,70 24.25,70 0.5,70.5 4,70.5 4.5,70.5 5,70.5 5.5,70.5 6,70.5 6.5,70.5 7,70.5 7.5,70.5 8,70.5 8.5,70.5 9,70.5 9.5,70.5 10,70.5 10.5,70.5 11,70.5 11.5,70.5 12,70.5 12.5,70.5 13,70.5 13.5,70.5 14,70.5 14.5,70.5 15,70.5 15.5,70.5 16,70.5 16.5,70.5 17,70.5 17.5,70.5 18,70.5 18.5,70.5 19,70.5 19.5,70.5 20,70.5 20.5,70.5 21,70.5 0.75,71 3.75,71 4.25,71 4.75,71 5.25,71 5.75,71 6.25,71 6.75,71 7.25,71 7.75,71 8.25,71 8.75,71 9.25,71 9.75,71 10.25,71 10.75,71 11.25,71 11.75,71 12.25,71 12.75,71 13.25,71 13.75,71 14.25,71 14.75,71 15.25,71 15.75,71 16.25,71 16.75,71 17.25,71 17.75,71 18.25,71 18.75,71 19.25,71 19.75,71 20.25,71 20.75,71 21.25,71 24.25,71 0.5,71.5 1,71.5 1.5,71.5 3,71.5 3.5,71.5 4,71.5 4.5,71.5 5,71.5 5.5,71.5 6,71.5 6.5,71.5 7,71.5 7.5,71.5 8,71.5 8.5,71.5 9,71.5 9.5,71.5 10,71.5 10.5,71.5 11,71.5 11.5,71.5 12,71.5 12.5,71.5 13,71.5 13.5,71.5 14,71.5 14.5,71.5 15,71.5 15.5,71.5 16,71.5 16.5,71.5 17,71.5 17.5,71.5 18,71.5 18.5,71.5 19,71.5 19.5,71.5 20,71.5 20.5,71.5 21,71.5 21.5,71.5 22,71.5 23.5,71.5 24,71.5 0.75,72 1.25,72 1.75,72 2.25,72 2.75,72 3.25,72 3.75,72 4.25,72 4.75,72 5.25,72 5.75,72 6.25,72 6.75,72 7.25,72 7.75,72 8.25,72 8.75,72 9.25,72 9.75,72 10.25,72 10.75,72 11.25,72 11.75,72 12.25,72 12.75,72 13.25,72 13.75,72 14.25,72 14.75,72 15.25,72 15.75,72 16.25,72 16.75,72 17.25,72 17.75,72 18.25,72 18.75,72 19.25,72 19.75,72 20.25,72 20.75,72 21.25,72 21.75,72 22.25,72 22.75,72 23.25,72 23.75,72 24.25,72 0.5,72.5 1,72.5 1.5,72.5 2,72.5 2.5,72.5 3,72.5 3.5,72.5 4,72.5 4.5,72.5 5,72.5 5.5,72.5 6,72.5 6.5,72.5 7,72.5 7.5,72.5 8,72.5 8.5,72.5 9,72.5 9.5,72.5 10,72.5 10.5,72.5 11,72.5 11.5,72.5 12,72.5 12.5,72.5 13,72.5 13.5,72.5 14,72.5 14.5,72.5 15,72.5 15.5,72.5 16,72.5 16.5,72.5 17,72.5 17.5,72.5 18,72.5 18.5,72.5 19,72.5 19.5,72.5 20,72.5 20.5,72.5 21,72.5 21.5,72.5 22,72.5 22.5,72.5 23,72.5 23.5,72.5 24,72.5
  other v2: 5.996,30.049 18.778,30.052 3.999,31.554 20.775,31.556 7.501,32.046 17.273,32.048 5.504,33.551 19.27,33.553 4.5,37.75 7,37.75 17.8,37.75 20.3,37.75 4.5,40.25 7,40.25 17.8,40.25 20.3,40.25 5.443,51.759 19.357,51.759 7.491,53.193 17.309,53.193 4.009,53.807 20.791,53.807 6.057,55.241 18.743,55.241 18.892,59.244 6.057,59.259 4.009,60.693 20.807,60.851 17.285,61.159 7.491,61.307 5.443,62.741 19.2,62.766
  other v5: 2.25,17.85 2.25,70 22.55,70
  other v6: 3,22.75 21.8,22.75
  other v7: 22.55,17.85
MW1: 
MW3: Designator26_1.1 Designator26_1.2 pad.3@14.15,52.05 | length 10.5
  Top Layer w0.8: pad.3@14.15,52.05 Designator26_1.1@14.15,56.485 ; Designator26_1.2@14.15,57.415 v2(19.05,61)
MW4: pad.41 | length 4.5
  Top Layer w0.8: pad.41@16.35,49.85 v2(19.05,53.5)
MW5: Designator28.1 Designator28.2 pad.Pad1@16.35,46.35 | length 7.6
  Top Layer w0.8: pad.Pad1@16.35,46.35 Designator28.2@19.05,44.065 ; v2(19.05,39) Designator28.1@19.05,43.1
MW6: Designator26.1 Designator26.2 pad.Pad1@15.55,44.2 | length 12
  Top Layer w0.8: pad.Pad1@15.557,44.201 Designator26.2@16.686,36.098
  Top Layer w0.9: Designator26.1@16.797,34.933 v2(19.024,31.802)
MW7: Designator23.1 Designator23.2 pad.Pad1@9.2,44.15 | length 12.1
  Top Layer w0.9: v2(5.75,31.8) Designator23.1@8.117,34.974 ; Designator23.2@8.211,36.105 pad.Pad1@9.2,44.15
"MW 2": Designator23_1.1 Designator23_1.2 pad.3@10.65,52.05 | length 10.5
  Top Layer w0.8: v2(5.75,61) Designator23_1.2@10.65,57.415 ; pad.3@10.65,52.05 10.65,54.4 Designator23_1.1@10.65,56.485
"MW 8": Designator27.1 Designator27.2 pad.Pad1@8.45,46.35 | length 7.7
  Top Layer w0.8: v2(5.75,39) Designator27.1@5.75,43.135 ; Designator27.2@5.75,44.065 pad.Pad1@8.45,46.35
copper on no net: | length 4.7
  Top Layer w0.1: 19.801,9.51 20.045,9.51
  Top Layer w0.8: v2(5.75,53.5) 8.45,49.9

## Polygon pours and split planes (outlines as drawn)
no net on Top Paste "NONET_L-01_P-001" (solid): 1.3,27.6
no net on Bottom Overlay "NONET_L02_P004" (solid): 17.05,45.5 7.8,45.5 7.8,52.25 16.8,52.25 17.05,52
GND on Top Layer "NONET_L-01_P-001" (solid, pour order 9): 24.672,72.768 0,72.768 0,0.166 0.166,0 0.242,0.076 24.672,0.076
GND on Bottom Layer "NONET_L-01_P-001" (solid, pour order 10): 24.672,72.768 0,72.768 0,0 24.341,0

## Keep-outs
Keep-Out Layer:
  lines w0.35: -2.7,0 27.55,0 27.55,80 -2.7,80 -2.7,0

## Other copper
Bottom Layer:
  rectangle net GND: 2.83,30.43 4.862,32.98
  rectangle net GND: 5.231,28.953 7.854,30.985
  rectangle net GND: 6.598,30.504 8.335,33.46
  rectangle net GND: 4.529,32.61 6.487,34.679
  rectangle net GND: 3.642,36.453 5.251,38.501
  rectangle net GND: 6.249,36.268 8.039,38.501
  rectangle net GND: 6.249,39.499 8.224,41.441
  rectangle net GND: 3.384,39.499 5.251,41.551
  rectangle net GND: 2.719,52.562 4.899,55.48
  rectangle net GND: 2.903,50.825 7.411,52.672
  rectangle net GND: 6.595,51.897 8.593,54.703
  rectangle net GND: 4.547,54.345 7.152,56.33
  rectangle net GND: 3.077,58.999 4.886,62.186
  rectangle net GND: 3.335,57.406 8.116,60.248
  rectangle net GND: 6.565,59.861 8.546,63.177
  rectangle net GND: 4.283,61.799 7.168,65.029
  rectangle net GND: 0.622,66.708 4.4,72.1
  rectangle net GND: 20.26,66.321 24.351,71.919
  rectangle net GND: 17.489,58.123 20.042,60.07
  rectangle net GND: 16.404,59.687 18.255,62.687
  rectangle net GND: 17.394,61.953 20.585,63.835
  rectangle net GND: 19.819,59.974 21.702,62.974
  rectangle net GND: 19.895,52.297 22.5,56.272
  rectangle net GND: 17.847,50.624 21.351,52.655
  rectangle net GND: 16.309,51.836 18.084,54.861
  rectangle net GND: 17.553,54.485 20.106,56.432
  rectangle net GND: 19.947,29.753 21.925,33.168
  rectangle net GND: 16.915,28.86 20.234,30.934
  rectangle net GND: 15.798,30.87 18.319,33.104
  rectangle net GND: 17.872,32.53 20.713,34.987
  rectangle net GND: 19.549,36.487 21.287,38.501
  rectangle net GND: 16.947,36.391 18.551,38.501
  rectangle net GND: 16.692,39.499 18.551,41.21
  rectangle net GND: 19.549,39.499 21.319,41.306
  rectangle net GND: 18.329,14.098 24.421,25.953
  rectangle net GND: 0.163,13.165 5.926,25.733
  region net GND: 4.4,72.1
Top Layer:
  rectangle net GND: 16.905,61.032 18.117,61.818
  rectangle net GND: 18.765,59.206 19.855,60.073
  rectangle net GND: 17.85,58.204 20.22,59.442
  rectangle net GND: 19.019,58.204 20.008,59.988
  rectangle net GND: 15.963,60.286 17.164,61.47
  rectangle net GND: 16.541,61.286 18.251,61.435
  rectangle net GND: 15.763,61.286 18.029,62.249
  rectangle net GND: 17.885,61.801 20.315,63.723
  rectangle net GND: 19.89,59.784 21.906,61.824
  rectangle net GND: 18.596,50.751 20.114,51.759
  rectangle net GND: 19.233,50.81 20.397,52.818
  rectangle net GND: 16.234,53.133 18.074,54.136
  rectangle net GND: 16.341,52.449 17.182,54.336
  rectangle net GND: 17.166,54.466 20.411,56.128
  rectangle net GND: 19.878,52.709 22.013,54.772
  rectangle net GND: 17.107,37.006 17.927,38.452
  rectangle net GND: 17.024,39.466 18.475,41.424
  rectangle net GND: 19.607,39.454 21.47,41.329
  rectangle net GND: 17.42,37.091 18.551,38.501
  rectangle net GND: 17.779,36.07 18.192,38.688
  rectangle net GND: 19.549,36.66 21.647,38.501
  rectangle net GND: 19.218,32.632 19.813,33.216
  rectangle net GND: 18.532,33.728 20.055,34.643
  rectangle net GND: 19.397,32.809 21.084,34.89
  rectangle net GND: 17.016,30.976 18.024,31.974
  rectangle net GND: 16.484,30.821 17.256,32.984
  rectangle net GND: 19.813,30.632 21.885,32.632
  rectangle net GND: 17.85,28.96 20.285,30.851
  rectangle net GND: 18.686,13.728 24.212,25.761
  rectangle net GND: 0.407,15.078 5.783,25.862
  rectangle net GND: 4.857,33.666 6.249,34.377
  rectangle net GND: 6.62,31.093 8.155,31.983
  rectangle net GND: 7.532,31.178 8.835,33.004
  rectangle net GND: 5.112,29.097 6.98,30.881
  rectangle net GND: 2.974,30.64 4.829,32.466
  rectangle net GND: 4.616,32.65 5.565,34.504
  rectangle net GND: 6.249,36.798 7.589,38.501
  rectangle net GND: 6.315,39.487 7.787,41.695
  rectangle net GND: 3.611,36.741 5.251,38.501
  rectangle net GND: 2.974,39.459 5.168,41.356
  rectangle net GND: 7.364,52.44 8.552,54.251
  rectangle net GND: 7.618,52.449 8.806,53.727
  rectangle net GND: 6.742,53.284 8.976,54.18
  rectangle net GND: 4.73,50.571 6.204,51.759
  rectangle net GND: 4.234,50.599 5.567,52.818
  rectangle net GND: 2.748,52.297 4.905,54.959
  rectangle net GND: 4.56,54.265 7.391,56.219
  rectangle net GND: 7.488,60.538 8.594,61.244
  rectangle net GND: 6.361,61.353 8.877,62.234
  rectangle net GND: 5.593,58.172 6.994,59.262
  rectangle net GND: 5.183,58.398 5.979,60.009
  rectangle net GND: 3.187,59.701 4.815,61.682
  rectangle net GND: 4.401,61.795 6.698,64.135
  rectangle net GND: 20.499,67.746 24.394,71.947
  rectangle net GND: 0.26,67.848 4.615,71.998
  region: 19.8,53
  pour cut-out: 9.05,51.5 15.75,51.5 15.75,44.8 9.05,44.8

## Silkscreen, mask and mechanical layers (free items; w line width, h text height)
Bottom Overlay:
  text "Chip" at 9.55,47.25 h1.52
Top Paste:
  rectangle: 0,0 24.8,80
  region: 1.25,33.1
Bottom Paste:
  rectangle: 8,43.8 16.65,44.75
  region: 7.7,50.9
  region: 8.05,51.55 8.05,52.35 16.65,52.35 16.65,51.55
  region: 8.6,51.1 7.9,51.1 7.9,50.1 8.6,50.1
  region: 9,44.15 8,44.15 8,52.35 9,52.35
  region: 15.9,46.9 16.7,46.9 16.7,48.2 15.9,48.2
  region: 15.85,52.35 16.75,52.35 16.75,43.85 15.85,43.85
Top Solder:
  rectangle: -0.35,-0.35 24.85,72.7
Bottom Solder:
  rectangle: 8.55,46 16.3,52.25
  rectangle: -0.1,-0.2 24.85,72.75
Mechanical 1:
  region: 8.85,44.6
  lines w0.2: 11.6,52.3 11.6,52.2 11.7,52.1 11.7,51.55 ; 13.25,51.25 13.25,52.25 13.3,52.25 13.4,52.35 13.4,52.4
  lines w0.254: 0,1.9 ccw(c1.725,1.925) 1.75,0.2 23.25,0.2 ccw(c23.25,1.75) 24.8,1.75 24.8,70.65 ccw(c23.05,70.65) 23.05,72.4 1.75,72.4 ccw(c1.75,70.7) 0.05,70.7 0.05,1.75